# Altium PCB PCB_单片机课设_2022-02-23.pcbdoc
Units mil, origin at the board's own origin, x right, y up, seen from the top; angles counter-clockwise.
Board outline 4947 x 4708.4 mil, 2 copper layers (Top Layer, Bottom Layer); 29 components, 60 nets, 140 pads, 10 vias.
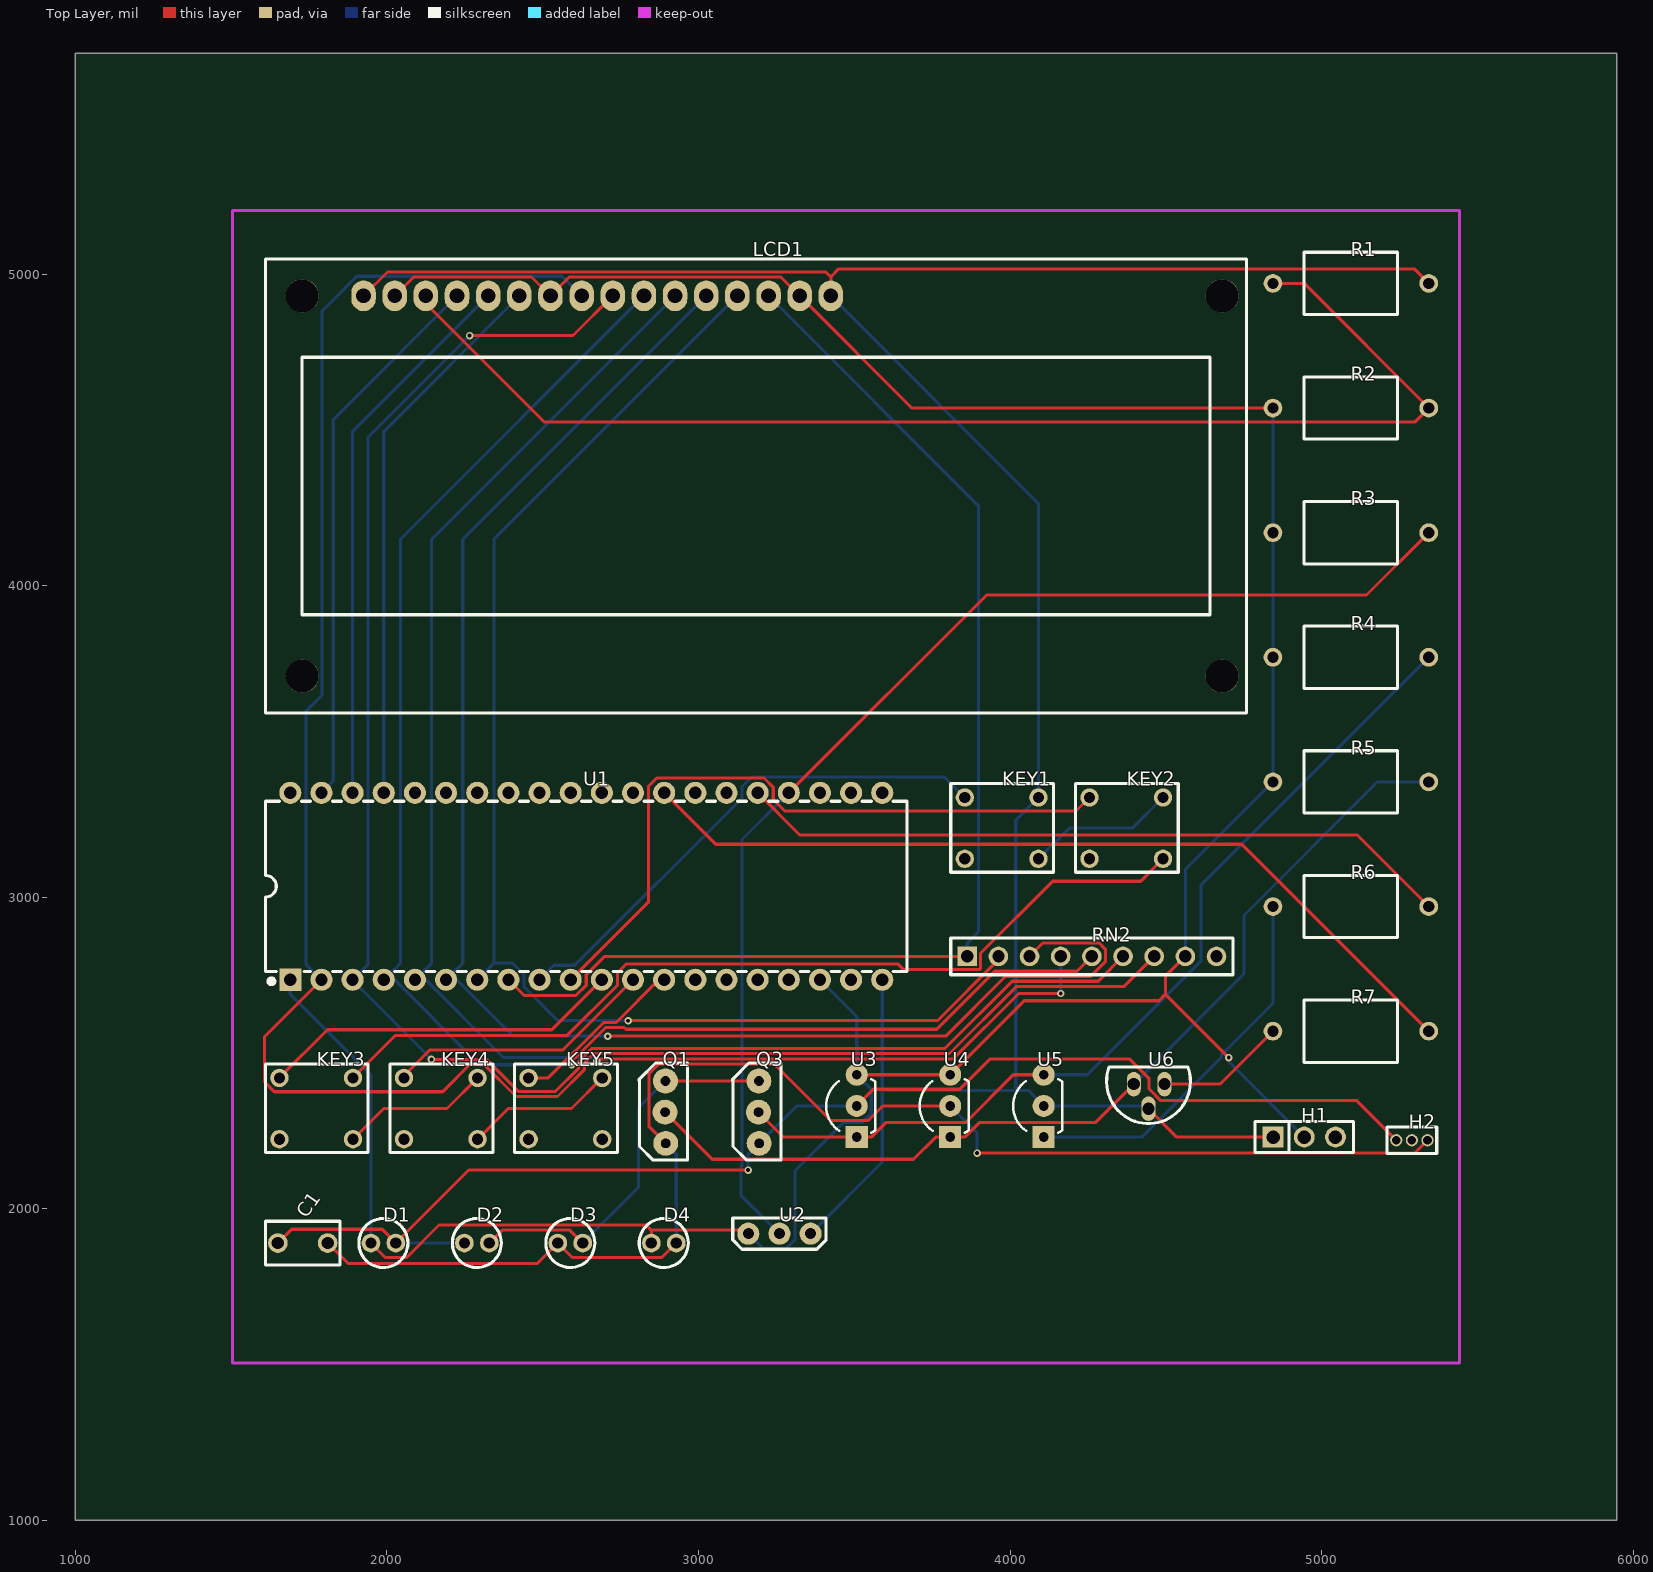
[diagram p0: Top Layer view]
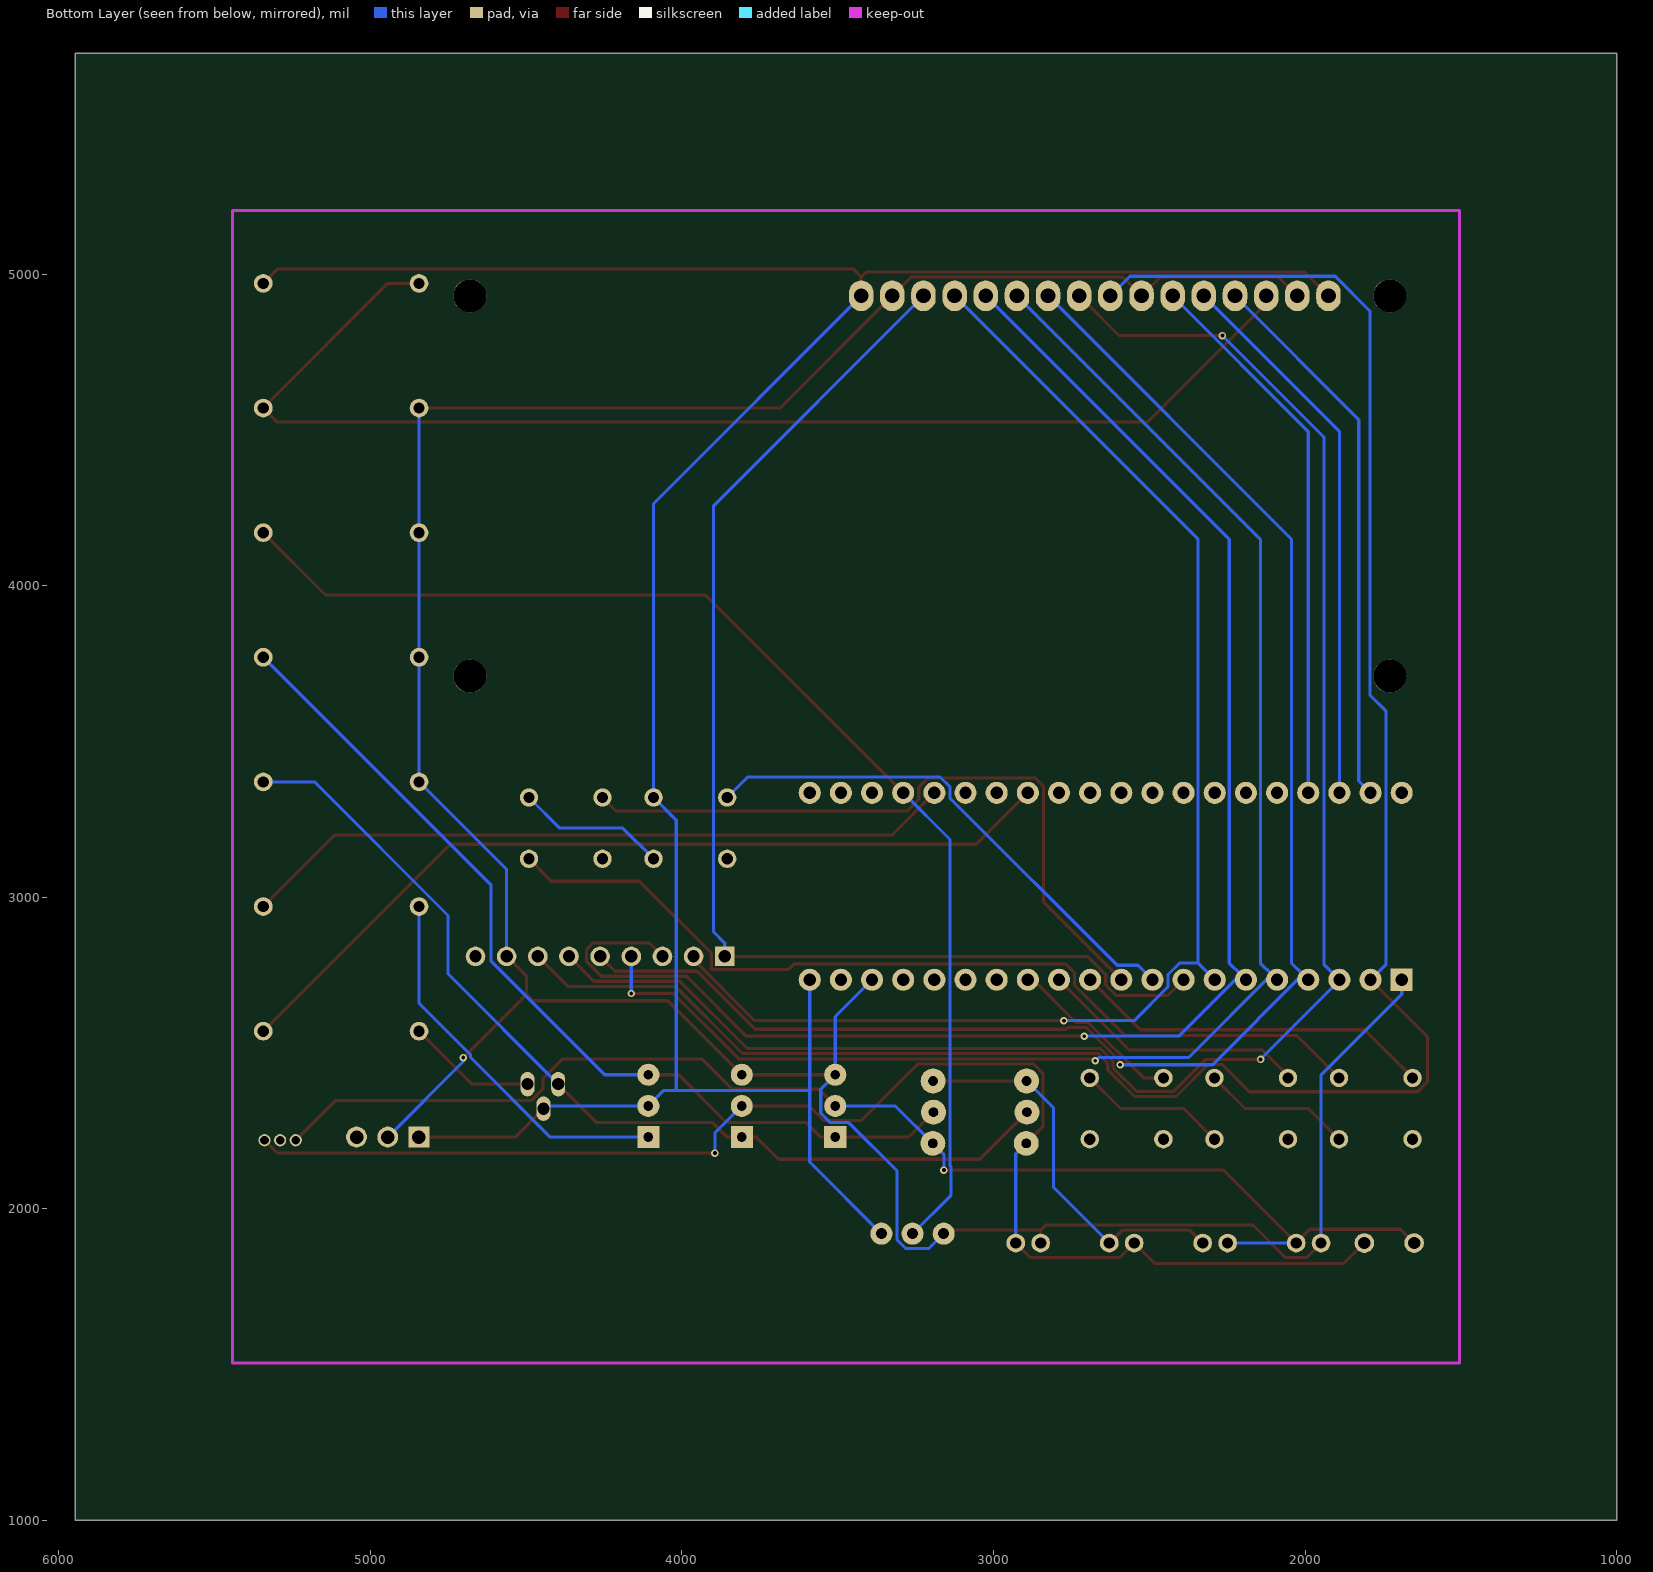
[diagram p1: Bottom Layer view, seen from below]

## Layer stack, top to bottom
Top Layer: signal copper (thickness not stored)
Dielectric: dielectric 12.6, FR-4, Dk 4.8
Bottom Layer: signal copper (thickness not stored)

## Board outline
5947,1000 1000,1000 1000,5708.4 5947,5708.4

## Components (designator, comment, footprint, x,y, rotation, side; value= is the part's Value field where it differs from the comment)
C1 "100nF" 独石电容脚距5MM 1734.89,1890 r0 top
D1 "M7_C84184" 二极管 1988.63,1890 r0 top
D2 "M7_C84184" 二极管 2288.63,1890 r0 top
D3 "M7_C84184" 二极管 2588.63,1890 r0 top
D4 "M7_C84184" 二极管 2888.63,1890 r0 top
H1 "DZ254R-11-03-63" HDR-TH_3P-P2.54-V-M 4944.4,2230 r0 top
H2 "DZ127R-11-03-25" HDR-TH_3P-P1.27-V-M 5289.81,2220 r0 top
KEY1 "K2-1102SP-A4SC-04" "微动开关 S2" 3854.89,3320 r0 top
KEY2 "K2-1102SP-A4SC-04" "微动开关 S2" 4254.89,3320 r0 top
KEY3 "K2-1102SP-A4SC-04" "微动开关 S2" 1654.89,2420 r0 top
KEY4 "K2-1102SP-A4SC-04" "微动开关 S2" 2054.89,2420 r0 top
KEY5 "K2-1102SP-A4SC-04" "微动开关 S2" 2454.89,2420 r0 top
LCD1 "LCM1602K-NSW-BBW" MODULE-TH_LCM1602K 2674.91,4930 r0 top
Q1 "S8550" 8550 2894.89,2210 r0 top
Q3 "S8550" 8550 3194.89,2210 r0 top
R1 "1k" 电阻 5043.89,4970 r0 top
R2 "10k" 电阻 5043.89,4570 r0 top
R3 "10k" 电阻 5043.89,4170 r0 top
R4 "1k" 电阻 5043.89,3770 r0 top
R5 "1k" 电阻 5043.89,3370 r0 top
R6 "1k" 电阻 5043.89,2970 r0 top
R7 "1k" 电阻 5043.89,2570 r0 top
RN2 "10K" RES-ARRAY-TH_9P-P2.54-D1.0 4262.64,2810 r0 top
U1 "STC15F2K60S2-28I-PDIP40" DIP-40_L52.3-W13.9-P2.54-LS15.2-BL 2639.89,3035 r0 top
U2 "A1101ELHLT-T" "3144 霍尔元件" 3259.89,1930 r0 top
U3 "2N3055" 8050NPN 3507.95,2330 r0 top
U4 "2N3055" 8050NPN 3807.95,2330 r0 top
U5 "2N3055" 8050NPN 4107.95,2330 r0 top
U6 "2N3055" S8050A 4444.4,2400 r0 top

## Footprints (in the part's own frame and the unit in brackets; to place one, negate y for a bottom-side part, rotate by r counter-clockwise, add the part's x,y. Pads: shape width x height; smd on the part's side, far side on the other; paste and mask are expansions set on the pad)
"3144 霍尔元件" [mm]
  round 1.8 hole 0.9: 1(-2.54,-0.254) 2(0,-0.254) 3(2.54,-0.254)
  silkscreen extent -3.81,-1.52 3.81,1.02
8050NPN [mm]
  rect 1.8x1.8 hole 0.8: 1(0,-2.54)
  round 1.8 hole 0.8: 2(0,0) 3(0,2.54)
  silkscreen extent -2.49,-2.19 1.51,2.19
8550 [mil]
  round 80 hole 30 slot 30.2 at 0 deg: 1(0,0) 2(-2,100) 3(-1,200)
  silkscreen extent -85,-54 70,258
DIP-40_L52.3-W13.9-P2.54-LS15.2-BL [mm]
  rect 1.8x1.8 hole 1: 1(-24.13,-7.62)
  round 1.8 hole 1: 2(-21.59,-7.62) 3(-19.05,-7.62) 4(-16.51,-7.62) 5(-13.97,-7.62) 6(-11.43,-7.62) 7(-8.89,-7.62) 8(-6.35,-7.62) 9(-3.81,-7.62) 10(-1.27,-7.62) 11(1.27,-7.62) 12(3.81,-7.62) 13(6.35,-7.62) 14(8.89,-7.62) 15(11.43,-7.62) 16(13.97,-7.62) 17(16.51,-7.62) 18(19.05,-7.62) 19(21.59,-7.62) 20(24.13,-7.62) 21(24.13,7.62) 22(21.59,7.62) 23(19.05,7.62) 24(16.51,7.62) 25(13.97,7.62) 26(11.43,7.62) 27(8.89,7.62) 28(6.35,7.62) 29(3.81,7.62) 30(1.27,7.62) 31(-1.27,7.62) 32(-3.81,7.62) 33(-6.35,7.62) 34(-8.89,7.62) 35(-11.43,7.62) 36(-13.97,7.62) 37(-16.51,7.62) 38(-19.05,7.62) 39(-21.59,7.62) 40(-24.13,7.62)
  silkscreen extent -26.16,-7.95 26.16,6.93
HDR-TH_3P-P1.27-V-M [mm]
  round 1 hole 0.7: 1(-1.27,0) 2(0,0) 3(1.27,0)
  silkscreen extent -2.03,-1.07 2.03,1.07
HDR-TH_3P-P2.54-V-M [mm]
  rect 1.7x1.7 hole 1.1: 1(-2.54,0)
  round 1.7 hole 1.1: 2(0,0) 3(2.54,0)
  silkscreen extent -4.02,-1.27 4.02,1.27
MODULE-TH_LCM1602K [mm]
  oval 2x2.5 hole 1.2: 1(-19.05,0) 2(-16.51,0) 3(-13.97,0) 4(-11.43,0) 5(-8.89,0) 6(-6.35,0) 7(-3.81,0) 8(-1.27,0) 9(1.27,0) 10(3.81,0) 11(6.35,0) 12(8.89,0) 13(11.43,0) 14(13.97,0) 15(16.51,0) 16(19.05,0)
  round 2.7 hole 2.7 unplated: ""(-24.051,-31.001) ""(-24.051,0) ""(50.95,-31.001) ""(50.95,0)
  silkscreen extent -27.05,-34 52.95,3
RES-ARRAY-TH_9P-P2.54-D1.0 [mm]
  rect 1.6x1.6 hole 1: 1(-10.16,0)
  round 1.6 hole 1: 2(-7.62,0) 3(-5.08,0) 4(-2.54,0) 5(0,0) 6(2.54,0) 7(5.08,0) 8(7.62,0) 9(10.16,0)
  silkscreen extent -11.5,-1.5 11.5,1.5
S8050A [mil]
  oval 45x78.74 hole 39: 1(51.18,0) 2(0,-78.85) 3(-47.25,0)
  silkscreen extent -134,-126 134,55
二极管 [mil]
  round 60 hole 36: 1(-40,0) 2(40,0)
  silkscreen extent -79,-79 79,79
"微动开关 S2" [mm]
  round 1.5 hole 0.914: 1(0,0) 2(0,-5) 3(6,0) 4(6,-5)
  silkscreen extent -1.14,-6.1 7.24,1.14
独石电容脚距5MM [mm]
  round 1.6 hole 1: 1(-2.159,0) 2(1.905,0)
  silkscreen extent -3.17,-1.78 2.92,1.78
电阻 [mil]
  round 60 hole 36: 1(300,0) 2(-200,0)
  silkscreen extent -100,-100 200,100

## Via types
v1: diameter 24.02, hole 12.01, Top Layer to Bottom Layer, 10 vias

## Nets (pads, with @x,y where several pads share a name; then routed paths per layer and width w, separated by ;. In a path a pad name is that pad's centre, name@x,y a point inside that pad or via, vN(x,y) a via of type N, cw(c..) or ccw(c..) an arc to the next point about the centre after c; other vN are vias at no path point)
+5V: H1.3
D1_2: C1.1 D1.2 D2.1 H2.1 Q3.1 U3.2 | length 4248.4
  Top Layer w10: C1.1 1694,1934.11 1984.52,1934.11 D1.2 2262.96,2124.33 v1(3159.3,2124.33) ; U3.2@3507.95,2330 3561.44,2383.49 3838.67,2383.49 3936.36,2481.18 4382.75,2481.18 4446.37,2417.56 4446.37,2384.19 4483.52,2347.04 5112.77,2347.04 H2.1
  Bottom Layer w10: D1.2 D2.1 ; v1(3159.3,2124.33) 3159.3,2174.41 Q3.1 3314.89,2330 U3.2@3507.95,2330
D2_2: D2.2 D3.2 Q1.3 Q3.3 | length 1264.3
  Top Layer w10: D2.2 2370.14,1931.51 2587.12,1931.51 D3.2 ; Q1.3 Q3.3
  Bottom Layer w10: D3.2 2807.55,2068.92 2807.55,2323.66 Q1.3
D3_1: C1.2 D3.1 D4.2 H2.3 Q1.1 U4.2 | length 4515.7
  Top Layer w10: C1.2 1875.73,1824.16 2482.79,1824.16 D3.1 2595.05,1843.58 2882.21,1843.58 D4.2 ; Q1.1 2841.74,2263.15 2841.74,2434.83 2872.03,2465.12 3242.18,2465.12 3424.1,2283.2 3545.06,2283.2 3591.86,2330 U4.2@3807.95,2330 ; v1@3894.08,2178.85 5298.66,2178.85 H2.3
  Bottom Layer w10: Q1.1 2928.63,2176.26 D4.2 ; U4.2@3807.95,2330 3894.08,2243.87 v1@3894.08,2178.85
  other v1: 3894.08,2178.85
GND: H1.1 KEY1.3 LCD1.1 LCD1.16 R1.1 U1.20 U2.3 U5.2 U6.2 | length 8631.3
  Top Layer w10: LCD1.1 2001.75,5006.84 3408.82,5006.84 3424.91,4990.75 ; LCD1.16 3424.91,4990.75 ; U6.2 4535.55,2230 H1.1 ; R1.1 5297.26,5016.63 3450.79,5016.63 3424.91,4990.75
  Bottom Layer w10: U2.3 3589.89,2150 3589.89,2380 ; LCD1.16 4091.11,4263.8 KEY1.3 4018.25,3247.14 4018.25,2380 ; U1.20 3589.89,2380 ; U6.2 4435.55,2330 4107.95,2330 4057.95,2380 4018.25,2380 ; 3589.89,2380 4018.25,2380
H2_2: H2.2
KEY1_1: KEY1.1 U1.9 | length 1683.2
  Bottom Layer w10: U1.9 2536.4,2781.51 2603.32,2781.51 3139.89,3318.08 3139.89,3354.24 3171.63,3385.98 3788.91,3385.98 KEY1.1
KEY1_2: KEY1.2
KEY1_4: KEY1.4 KEY2.3 | length 481.5
  Bottom Layer w10: KEY1.4 4189.54,3221.58 4392.69,3221.58 KEY2.3
KEY2_1: KEY2.1 U1.10 | length 2236.1
  Top Layer w10: U1.10 2839.89,2985 2839.89,3357.04 2865.52,3382.67 3210.19,3382.67 3239.89,3352.97 3239.89,3313.5 3276.59,3276.8 4211.69,3276.8 KEY2.1
KEY2_2: KEY2.2
KEY2_4: KEY2.4 KEY3.3 | length 2958.1
  Top Layer w10: KEY3.3 2027.42,2556.31 2578.36,2556.31 2739.89,2717.84 2739.89,2757.64 2767.46,2785.21 3641.37,2785.21 3659.16,2767.42 3902.29,2767.42 3905.22,2770.35 3905.22,2819.58 4136.75,3051.11 4419.07,3051.11 KEY2.4
KEY3_1: KEY3.1 U1.11 | length 1165.5
  Top Layer w10: KEY3.1 1809.54,2574.65 2529.55,2574.66 U1.11
KEY3_2: KEY3.2
KEY3_4: KEY3.4 KEY4.3 | length 481.5
  Top Layer w10: KEY3.4 1989.54,2321.58 2192.69,2321.58 KEY4.3
KEY4_1: KEY4.1 U1.12 | length 869.8
  Top Layer w10: KEY4.1 2054.89,2427.34 2137.03,2509.48 2564.37,2509.48 U1.12
KEY4_2: KEY4.2
KEY4_4: KEY4.4 KEY5.3 | length 481.5
  Top Layer w10: KEY4.4 2389.54,2321.58 2592.69,2321.58 KEY5.3
KEY5_2: KEY5.2
KEY5_4: KEY5.4
LCD1_3: LCD1.3 R1.2 R2.1 | length 4085.7
  Top Layer w10: LCD1.3 2124.91,4905.42 2505.56,4524.77 5298.66,4524.77 R2.1 4943.89,4970 R1.2
RN2_9: RN2.9
U1_2: LCD1.8 RN2.7 U1.2 | length 6644.2
  Top Layer w10: U1.2 1606.96,2552.07 1606.96,2407.14 1638.69,2375.41 2178.69,2375.41 2266.6,2463.32 2311.32,2463.32 2414.16,2360.48 2547.56,2360.48 2633.2,2446.12 2633.2,2467.39 2664.02,2498.21 3805.7,2498.21 4021.43,2713.94 4366.58,2713.94 RN2.7
  Bottom Layer w10: U1.2 1739.89,2785 1739.89,3596.77 1792.24,3649.12 1792.24,4881.67 1903.7,4993.13 2561.78,4993.13 LCD1.8
U1_3: LCD1.9 RN2.6 U1.3 | length 5550.1
  Top Layer w10: v1(2142.95,2479.41) 2318.61,2479.41 2421.45,2376.57 2540.89,2376.57 2617.11,2452.79 2617.11,2474.05 2657.36,2514.3 3790.97,2514.3 4006.7,2730.03 4282.67,2730.03 RN2.6 ; v1@2265.45,4802.6 2597.51,4802.6 LCD1.9
  Bottom Layer w10: v1(2142.95,2479.41) 1889.89,2732.47 U1.3 1939.89,2785 1939.89,4477.04 v1@2265.45,4802.6
  other v1: 2265.45,4802.6
U1_4: LCD1.10 RN2.5 U1.4 | length 5072.1
  Top Layer w10: v1(2594.03,2462.36) 2594.03,2473.74 2702.22,2581.93 2761.42,2581.93 2767.32,2576.03 3765.3,2576.03 3951.48,2762.21 4214.85,2762.21 RN2.5
  Bottom Layer w10: U1.4 U1.4@2007.01,2752.12 ; v1(2594.03,2462.36) 2296.77,2462.36 U1.4@2007.01,2752.12 ; LCD1.10 2043.38,4148.47 2043.38,2788.49 U1.4@2007.01,2752.12
U1_5: LCD1.11 RN2.4 U1.5 | length 4919.7
  Top Layer w10: v1(2673.57,2475.13) 2679.66,2481.22 3817.83,2481.22 4027.46,2690.85 v1@4162.64,2690.85
  Bottom Layer w10: U1.5 U1.5@2107.01,2752.12 ; v1(2673.57,2475.13) 2663.26,2485.44 2373.69,2485.44 U1.5@2107.01,2752.12 ; LCD1.11 2143.38,4148.47 2143.38,2788.49 U1.5@2107.01,2752.12 ; v1@4162.64,2690.85 RN2.4
  other v1: 4162.64,2690.85
U1_6: LCD1.12 RN2.3 U1.6 | length 5130.1
  Top Layer w10: v1(2708.72,2554.03) 3793.51,2554.03 3985.6,2746.12 4259.03,2746.12 4306.03,2793.12 4306.03,2832.77 4285.94,2852.86 4105.5,2852.86 RN2.3
  Bottom Layer w10: U1.6 U1.6@2207.01,2752.12 ; v1(2708.72,2554.03) 2405.1,2554.03 U1.6@2207.01,2752.12 ; LCD1.12 2243.38,4148.47 2243.38,2788.49 U1.6@2207.01,2752.12
U1_7: LCD1.13 RN2.2 U1.7 | length 4352
  Top Layer w10: v1(2774.03,2603.6) 3767.39,2603.6 3962.64,2798.85 RN2.2
  Bottom Layer w10: U1.7 2343.38,2788.49 ; v1(2774.03,2603.6) 2548.56,2603.6 2439.89,2712.27 2439.89,2751.92 2403.32,2788.49 2343.38,2788.49 ; LCD1.13 2343.38,4148.47 2343.38,2788.49
U1_8: LCD1.14 RN2.1 U1.8 | length 3979.2
  Top Layer w10: U1.8 2440.57,2684.32 2606.37,2684.32 2639.89,2717.84 2639.89,2751.13 2698.76,2810 3820.08,2810 RN2.1
  Bottom Layer w10: LCD1.14 3898.53,4256.38 3898.53,2888.46 3862.64,2852.57 RN2.1
U1_13: KEY5.1 U1.13 | length 565.5
  Top Layer w10: KEY5.1 2517.54,2420 2695.56,2598.02 2735.58,2598.02 2872.56,2735 U1.13
U1_14: U1.14
U1_15: U1.15
U1_16: U1.16
U1_17: U1.17
U1_19: U1.19
U1_21: U1.21
U1_22: U1.22
U1_23: U1.23
U1_24: R3.1 U1.24 U2.2 | length 3929.7
  Top Layer w10: U1.24 3924.89,3970 5143.89,3970 R3.1
  Bottom Layer w10: U2.2 3136.22,2043.67 3136.22,2133.89 3139.83,2137.5 3139.83,3184.94 U1.24
U1_25: R6.1 U1.25 | length 2305.2
  Top Layer w10: U1.25 3325.36,3199.53 5114.36,3199.53 R6.1
U1_26: U1.26
U1_27: U1.27
U1_28: R7.1 U1.28 | length 2770.9
  Top Layer w10: U1.28 3054.91,3169.98 4743.91,3169.98 R7.1
U1_29: U1.29
U1_30: U1.30
U1_31: U1.31
U1_32: U1.32
U1_33: U1.33
U1_34: U1.34
U1_35: U1.35
U1_36: U1.36
U1_37: LCD1.6 U1.37 | length 1775.2
  Bottom Layer w10: U1.37 1989.89,4494.39 2424.91,4929.41 LCD1.6
U1_38: LCD1.5 U1.38 | length 1775.2
  Bottom Layer w10: U1.38 1889.89,4494.98 LCD1.5
U1_39: LCD1.4 U1.39 | length 1775.2
  Bottom Layer w10: U1.39 1827.72,3372.83 1827.72,4532.81 LCD1.4
U1_40: U1.40
U3_1: Q3.2 R4.1 U3.1 U5.3 | length 2965.1
  Top Layer w10: Q3.2 3272.89,2230 3507.95,2230 3530.77,2230 3554.45,2230 3600.95,2276.5 3857.27,2276.5 4010.77,2430 U5.3@4107.95,2430
  Bottom Layer w10: U5.3@4107.95,2430 4248.16,2430 4612.64,2794.48 4612.64,3038.75 R4.1
U4_1: Q1.2 R5.1 U4.1 U6.3 | length 3125.1
  Top Layer w10: Q1.2 3043.97,2158.92 3690.37,2158.92 3761.45,2230 3807.95,2230 3831.2,2230 3854.45,2230 3900.95,2276.5 4273.66,2276.5 U6.3
  Bottom Layer w10: U6.3 4750.99,2753.83 4750.99,2941.43 5179.56,3370 R5.1
U5_1: R6.2 U5.1 | length 1229.4
  Bottom Layer w10: U5.1@4107.95,2230 4422.99,2230 4678.89,2485.9 4678.89,2494.76 4843.89,2659.76 R6.2
U6_1: R7.2 U6.1 | length 418.7
  Top Layer w10: U6.1 4673.89,2400 R7.2
VCC: D1.1 D4.1 H1.2 LCD1.2 LCD1.7 LCD1.15 R2.2 R3.2 R4.2 R5.2 RN2.8 U1.1 U1.18 U2.1 U3.3 U4.3 | length 10333
  Top Layer w10: D1.1 1995.05,1843.58 2063.11,1843.58 2167.13,1947.6 2832.54,1947.6 2848.63,1931.51 ; LCD1.2 2085.65,4990.74 2464.17,4990.74 LCD1.7 2585.66,4990.75 3264.16,4990.75 LCD1.15 3684.91,4570 R2.2 ; D4.1 2848.63,1931.51 ; U2.1 3148.38,1931.51 2848.63,1931.51 ; U3.3@3507.95,2430 3807.95,2430 4045.72,2667.77 4477.96,2667.77 4498.68,2688.49 ; RN2.8 4498.68,2746.04 4498.68,2688.49 ; v1(4701.97,2485.2) 4498.68,2688.49
  Bottom Layer w10: U1.1 1689.89,2688.5 1948.63,2429.76 D1.1 ; U2.1 3207.6,1872.29 3281.78,1872.29 3309.89,1900.4 3309.89,2122.03 3464.37,2276.51 3523.54,2276.51 3554.46,2307.43 3554.46,2383.49 3507.95,2430 3507.95,2616.94 U1.18 ; RN2.8 4562.64,3088.75 R5.2 R4.2 R3.2 R2.2 ; v1(4701.97,2485.2) 4701.97,2472.43 H1.2
pads on no net: LCD1.